# Altium PCB REALY_T0.10.PcbDoc
Units mil, origin at the board's own origin, x right, y up, seen from the top; angles counter-clockwise.
Board outline 2720.08 x 2838.58 mil, 4 copper layers (TopLayer, MidLayer1, MidLayer2, BottomLayer); 23 components, 16 nets, 57 pads, 16 vias.
Unrouted connection lines stored in the file: 1.
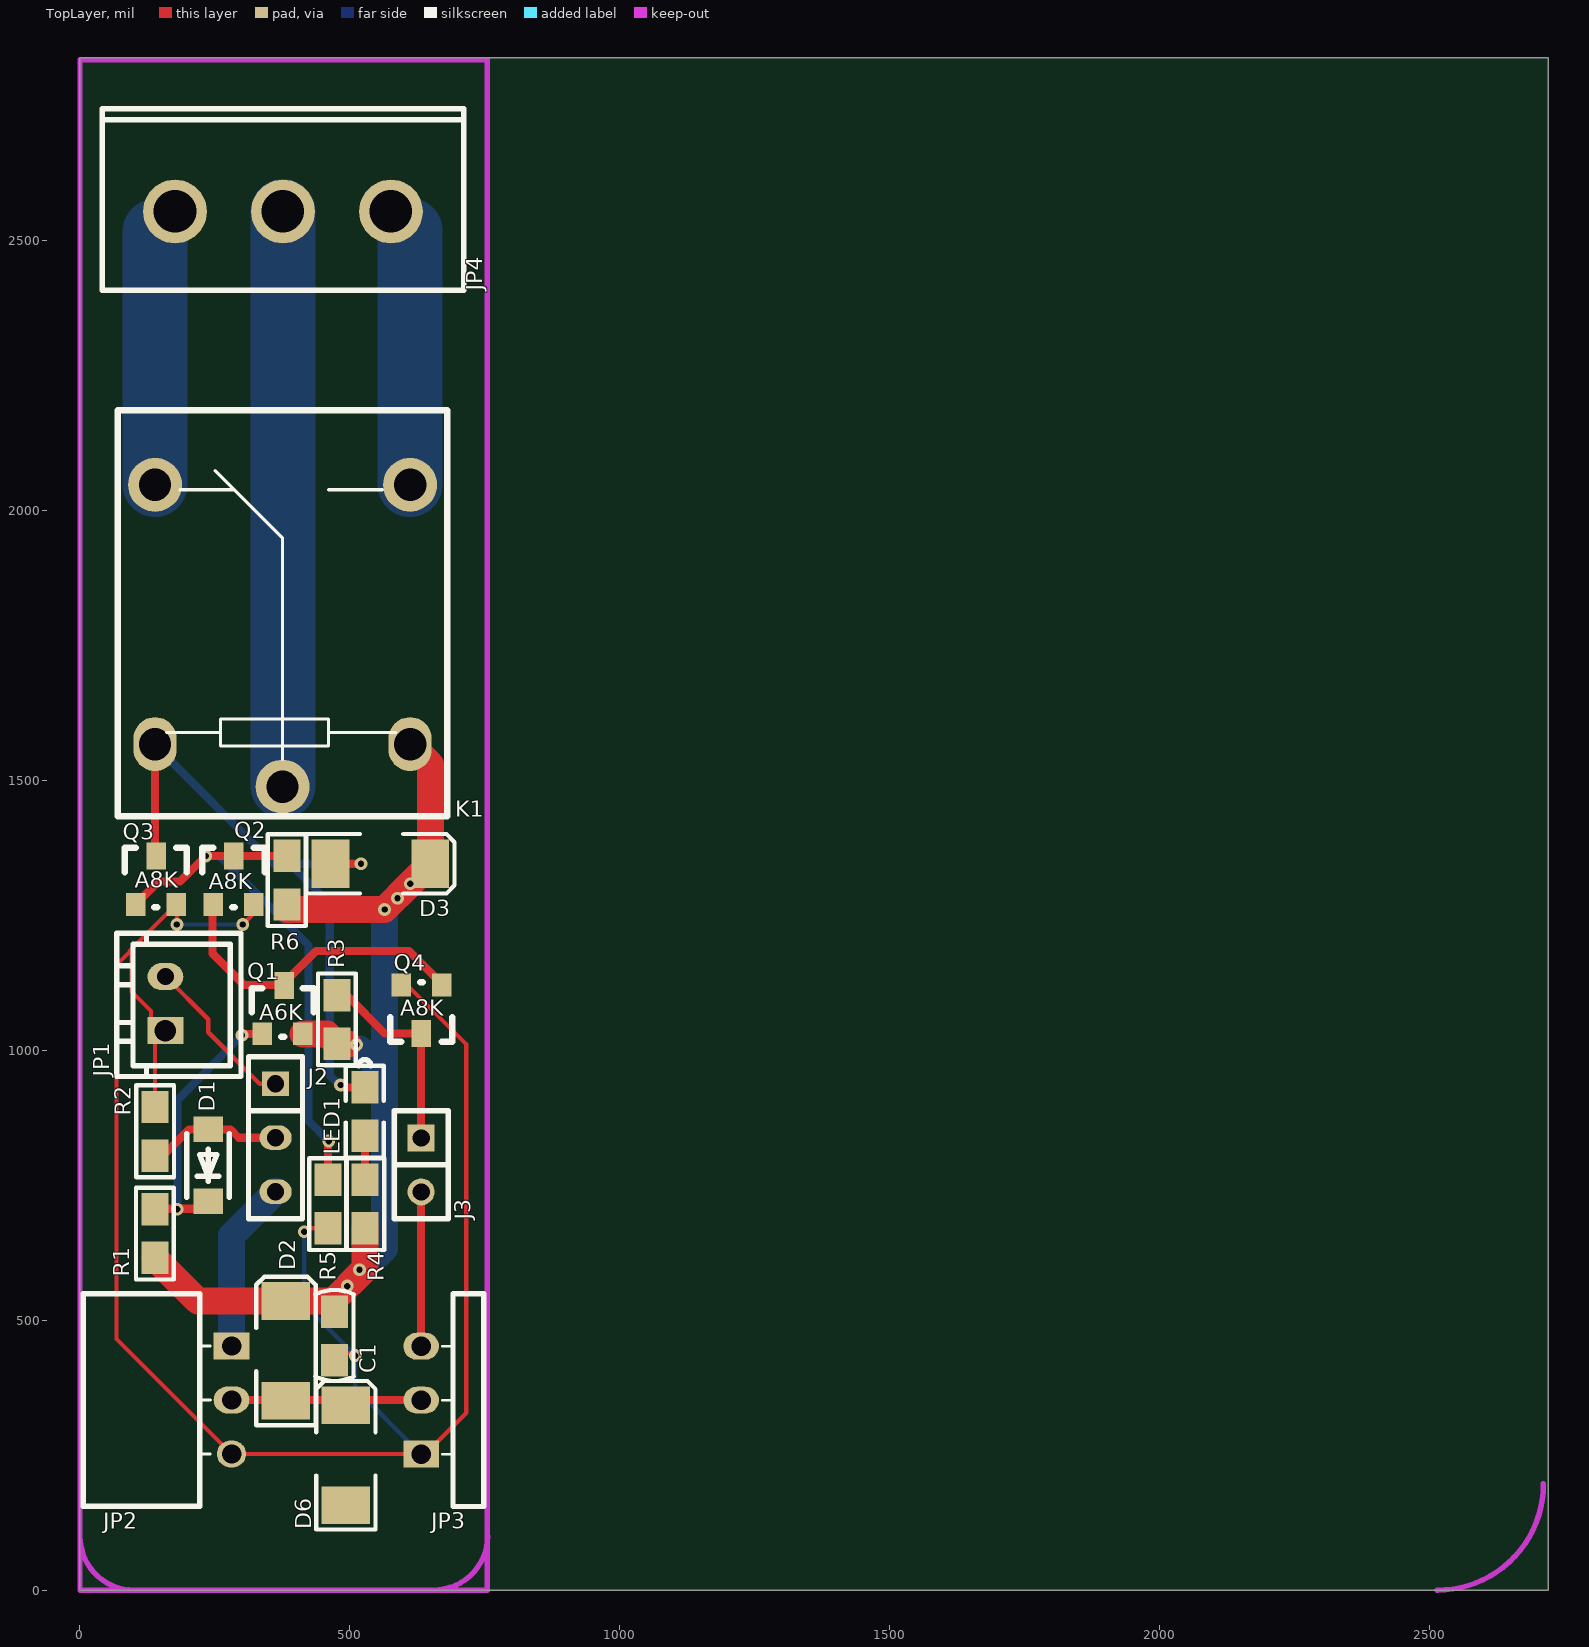
[diagram p0: TopLayer view]
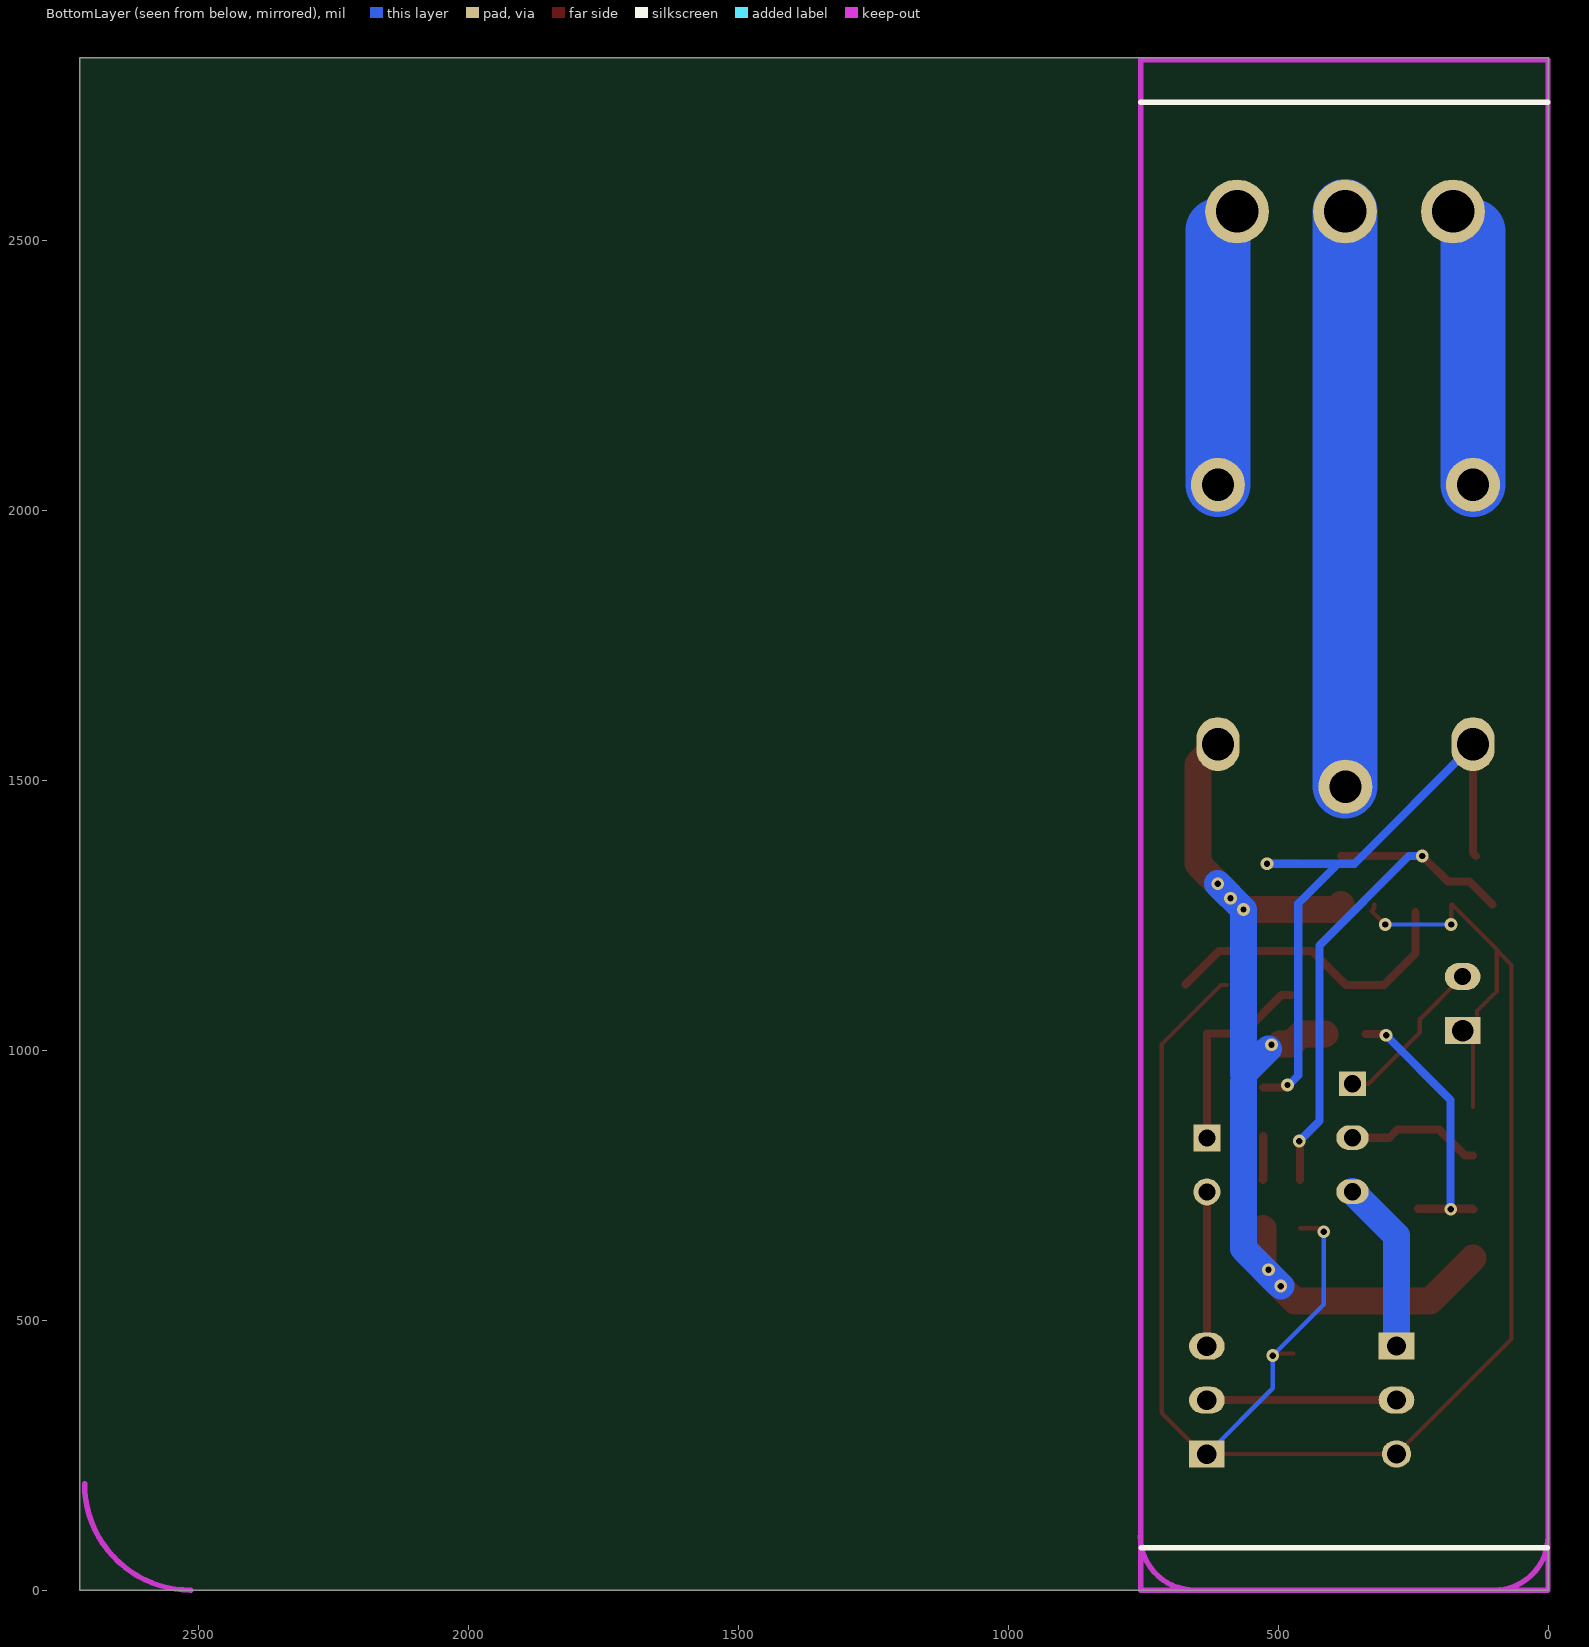
[diagram p1: BottomLayer view, seen from below]

## Layer stack, top to bottom
TopLayer: signal copper 1.4
Dielectric: core 12.6, FR-4, Dk 4.8
MidLayer1: signal copper 1.4
Dielectric: prepreg 12.6, FR-4, Dk 4.8
MidLayer2: signal copper 1.4
Dielectric: core 12.6, FR-4, Dk 4.8
BottomLayer: signal copper 1.4

## Board outline
-0.39,0 2719.68,0 2719.69,2838.58 -0.39,2838.58

## Design rules (kind name [scope] priority, off if disabled: settings)
Clearance Poly [(InPoly)] p1: gap=20
Clearance Clearance_1 [All] p2 off: gap=15
Clearance [All] p3: gap=7
ComponentClearance ComponentClearance_1 [All] p1 off: gap=10 collisioncheckmode=3 verticalgap=10 showdistances=FALSE
FabricationTestPointUsage TestPointUsage [All] p1: valid=0 allowmultiple=FALSE
FabricationTestpoint Testpoint [All] p1: side=3 testpointundercomponent=TRUE minsize=40 maxsize=100 preferedsize=60 minholesize=20 maxholesize=40 preferedholesize=32 testpointgrid=1 allowsidetop=TRUE allowsidebottom=TRUE usegrid=TRUE gridtolerance=0.01
HoleSize [All] p1: absolutevalues=TRUE maxlimit=200 minlimit=0 maxpercent=80.000 minpercent=20.000
ParallelSegment [All] p1: limit=10000 gap=10
PolygonConnect via [All vs IsVia] p1: connectstyle=Direct reliefconductorwidth=10 reliefentries=4 polygonreliefangle="90 Angle"
PolygonConnect [All] p2: connectstyle=Relief reliefconductorwidth=24 reliefentries=4 polygonreliefangle="90 Angle"
RoutingLayers [All] p1: top layer_v5=TRUE mid layer 1_v5=FALSE mid layer 2_v5=FALSE bottom layer_v5=TRUE
RoutingVias RoutingVias_3 [All] p1: holewidth=20 width=30 viastyle="Through Hole" minholewidth=20 minwidth=30 maxholewidth=20 maxwidth=30
RoutingVias [All] p2 off: holewidth=16 width=28 viastyle="Through Hole" minholewidth=16 minwidth=28 maxholewidth=50 maxwidth=100
SilkscreenOverComponentPads SilkToSolderMaskClearance [IsPad] p1: minsilkscreentomaskgap=10
SolderMaskExpansion [All] p1: expansion=4
Width [InNetClass('All From-Tos')] p1 off: maxlimit=100 minlimit=8 preferedwidth=60
Width Width_1 [All] p2: maxlimit=100 minlimit=3.94 preferedwidth=8
22 further rules are at their usual default settings.

## Components (designator, comment, footprint, x,y, rotation, side; value= is the part's Value field where it differs from the comment)
C1 "104" 0805C 471.65,516.14 r270 top
D1 "1N4148" SOD-123_L2.8-W1.8-LS3.7-RD 237.4,787.01 r90 top
D2 "1N4007" SMA 381.5,350.79 r90 top
D3 "1N4007" SMA 463.82,1345.67 r0 top
D6 "SMAJ12CA" SMA 492.52,157.52 r90 top
J2 "HEADER 3" SIP3 362.2,938.19 r270 top
J3 "CON2" SIP2 631.89,837.8 r270 top
JP1 "CON2" CON2A 158.27,1036.61 r90 top
JP2 "HEADER 3" XH2.54-W-3P#1 280.71,352.36 r270 top
JP3 "HEADER 3" XH2.54-W-3P#2 631.89,351.97 r90 top
JP4 "KF142V-3P" CONN-TH_3P-P5.08-WJ2EDGVC-3P 375.98,2553.94 r0 top
K1 "SRD-12VDC-SL-C" REALY-SRD 375.2,1488.58 r180 top
LED1 "LED-YG" LED0805 527.56,841.5 r90 top
Q1 "SS8550" SOT-23PNP 337.95,1030.47 r0 top
Q2 "LMUN2233LT1G" SOT-23NPN 246.85,1270.08 r0 top
Q3 "LMUN2233LT1G" SOT-23NPN 102.95,1270.08 r0 top
Q4 "LMUN2233LT1G" SOT-23NPN 669.89,1121.1 r180 top
R1 "103" 0805A 138.58,705.51 r270 top
R2 "103" 0805A 138.98,805.12 r90 top
R3 "302" 0805A 475.98,1102.2 r270 top
R4 "103" 0805A 528.35,760.24 r270 top
R5 "103" 0805A 459.45,760.24 r270 top
R6 "103" 0805A 383.07,1270.24 r90 top

## Footprints (in the part's own frame and the unit in brackets; to place one, negate y for a bottom-side part, rotate by r counter-clockwise, add the part's x,y. Pads: shape width x height; smd on the part's side, far side on the other; paste and mask are expansions set on the pad)
0805A [mil]
  rect 60x50 smd: 1(0,0) 2(90,0)
  silkscreen extent -40,-35 130,35
0805C [mil]
  rect 60x50 smd: 1(0,0) 2(90,0)
  silkscreen extent -40,-36 128,36
CON2A [mil]
  rect 50x66 hole 40: 1(0,0)
  oval 50x66 hole 32: 2(100,0)
  silkscreen extent -85,-140 180,90
CONN-TH_3P-P5.08-WJ2EDGVC-3P [mm]
  round 3 hole 2: 1(-5.08,0) 2(0,0) 3(5.08,0)
  silkscreen extent -8.5,-3.71 8.5,4.83
LED0805 [mil]
  rect 60x50 smd: A(0,0) K(90,0)
  silkscreen extent -40,-35 141,35
REALY-SRD [mm]
  round 2.54 hole 1.524: 1(0,0) 2(-6,-14.2) 3(6,-14.2)
  oval 2.032x2.54 hole 1.524: 4(6,-2) 5(-6,-2)
  silkscreen extent -7.75,-17.7 7.75,1.4
SIP2 [mil]
  rect 50x50 hole 32: 1(0,0)
  round 50 hole 32: 2(100,0)
  silkscreen extent -50,-50 150,50
SIP3 [mil]
  rect 46x50 hole 32: 1(0,0)
  oval 46x60 hole 32: 2(100,0) 3(200,0)
  silkscreen extent -50,-50 250,50
SMA [mil]
  rect 70x90 smd: 1(0,0) 2(185,0)
  silkscreen extent -45,-55 230,55
SOD-123_L2.8-W1.8-LS3.7-RD [mm]
  rect 1.2x1.4 smd: 1(1.7,0) 2(-1.7,0)
  silkscreen extent -1.5,-1 1.5,1
SOT-23NPN [mil]
  rect 36x42 smd: 1(0,0) 3(75,0)
  rect 36x50 smd: 2(38,90)
  silkscreen extent -20,-5 95,105
SOT-23PNP [mil]
  rect 36x42 smd: 1(0,0) 2(75,0)
  rect 36x50 smd: 3(40,90)
  silkscreen extent -20,-5 95,85
XH2.54-W-3P#1 [mil]
  rect 50x66 hole 36: 1(-100,0)
  oval 50x66 hole 36: 2(0,0)
  oval 50x54 hole 36: 3(100,0)
  silkscreen extent -197,-275 197,-39
XH2.54-W-3P#2 [mil]
  rect 50x66 hole 36: 1(-100,0)
  oval 50x66 hole 36: 2(0,0) 3(100,0)
  silkscreen extent -197,-116 197,-39

## Part data
C1: library part CAP, "Capacitor"
D1 D2 D3 D6: library part DIODE, "Diode"
J3 JP1: "Connector"
JP4: library part "HEADER 3"
K1: library part RELAY-SPDT
LED1: library part LED
Q1: library part PNP, "PNP Transistor"
Q2 Q3 Q4: library part NPN, "NPN Transistor"
R1 R2 R3 R4 R5 R6: library part RES

## Via types
v1: diameter 23.62, hole 11.81, TopLayer to BottomLayer, 16 vias

## Nets (pads, with @x,y where several pads share a name; then routed paths per layer and width w, separated by ;. In a path a pad name is that pad's centre, name@x,y a point inside that pad or via, vN(x,y) a via of type N, cw(c..) or ccw(c..) an arc to the next point about the centre after c; other vN are vias at no path point)
12V: C1.1 D2.2 D3.2 K1.5 Q1.2 R1.2 R3.2 R4.2 R6.1 | length 2005.7
  TopLayer w50: R1.2 218.31,535.79 D2.2 468.46,535.79 528.35,595.67 R4.2 ; R6.1 383.07,1261.02 v1(564.17,1261.02) v1(611.81,1308.66) D3.2 648.82,1529.92 K1.5 ; Q1.2 457.72,1030.47 R3.2 R3.2@496.65,1012.2
  BottomLayer w50: v1(494.88,563.39) 564.17,632.68 564.17,942.52 ; v1@518.11,1002.36 564.17,956.3 v1(564.17,1261.02) v1(611.81,1308.66)
  other v1: 517.72,593.7 512.2,1010.24 588.19,1281.89
+12V_IN: D2.1 D6.2 JP2.2 JP3.2 | length 351.3
  TopLayer w15: JP2.2 631.5,352.36 JP3.2
COM5: JP4.2 K1.1 | length 1065.7
  BottomLayer w8: K1.1 K1.1@375.98,1489.37
  BottomLayer w120: K1.1@375.98,1489.37 JP4.2
GND: C1.2 D6.1 JP1.1 JP2.3 JP3.1 Q2.3 Q3.3 Q4.3 R2.2 R5.2 | length 3573.1
  TopLayer w8: 95.28,1183.46 95.28,1109.06 131.5,1072.83 JP1.1@131.5,1039.37 ; R2.2 138.98,1017.32 JP1.1 ; v1(179.53,1233.07) 179.53,1268.5 Q3.3 91.73,1183.86 91.73,1182.28 67.72,1158.27 67.72,465.35 JP2.3 631.5,252.36 JP3.1 638.98,251.97 715.75,328.74 715.75,1011.02 605.67,1121.1 Q4.3 ; v1(301.57,1233.07) 326.77,1258.27 321.85,1263.19 Q2.3 ; v1(415.35,663.78) 421.81,670.24 R5.2 ; C1.2@471.65,438.35 506.14,438.35 v1(509.84,434.65)
  BottomLayer w8: v1(179.53,1233.07) v1(301.57,1233.07) ; v1(415.35,663.78) 415.35,529.13 v1(509.84,434.65) 509.84,374.02 JP3.1
NC5: JP4.1 K1.3 | length 521.6
  BottomLayer w8: JP4.1@138.98,2516.93 JP4.1
  BottomLayer w120: K1.3 JP4.1@138.98,2516.93
NetD1_1: D1.1 J2.2 R2.1 | length 249.3
  TopLayer w15: R2.1 153.98,805.12 202.01,853.15 279.09,853.15 294.06,838.19 J2.2
NetD1_2: D1.2 Q1.1 R1.1 | length 513.1
  TopLayer w15: R1.1 139.76,706.69 237.4,706.69 D1.2@240.55,706.69 ; v1(300,1027.95) 302.52,1030.47 Q1.1
  BottomLayer w15: v1(180.32,705.91) 180.32,908.27 v1(300,1027.95)
NetD3_1: D3.1 K1.4 LED1.K Q3.2 | length 1237
  TopLayer w15: Q3.2@133.86,1360.24 138.98,1365.35 K1.4 ; D3.1 v1(520.47,1345.67) ; v1(482.68,935.83) 487.01,931.5 LED1.K
  BottomLayer w15: K1.4 138.98,1565.35 358.66,1345.67 388.98,1345.67 ; v1(482.68,935.83) 480.32,935.83 462.6,953.54 462.6,1272.05 388.98,1345.67 ; v1(520.47,1345.67) 388.98,1345.67
NetJ2_1: J2.1 JP1.2 | length 300.2
  TopLayer w8: JP1.2 237.4,1057.48 237.4,1033.46 332.68,938.19 J2.1
NetJ2_3: J2.3 JP2.1 | length 319.6
  BottomLayer w50: JP2.1 280.71,656.69 J2.3
NetJ3_1: J3.1 Q4.2 R3.1 | length 378.7
  TopLayer w15: R3.1 493.46,1102.2 564.57,1031.1 Q4.2 J3.1
NetJ3_2: J3.2 JP3.3 | length 285.8
  TopLayer w15: JP3.3 J3.2
NetLED1_A: LED1.A R4.1 | length 81.6
  TopLayer w15: LED1.A 527.56,761.02 R4.1
NetQ1_2: Q1.3 Q2.1 Q4.1 | length 578.5
  TopLayer w15: Q2.1@245.67,1255.91 245.67,1179.53 304.09,1121.1 374.25,1121.1 437.4,1184.25 609.45,1184.25 Q4.1@671.65,1122.05
NetQ2_2: Q2.2 Q3.1 R5.1 R6.2 | length 1026.8
  TopLayer w15: Q3.1 145.47,1312.6 185.43,1312.6 v1(232.91,1360.08) Q2.2 382.91,1360.08 R6.2 ; R5.1 459.45,830.71 v1(460.63,831.89)
  BottomLayer w15: v1(232.91,1360.08) 258.03,1360.08 423.62,1194.49 423.62,868.9 v1(460.63,831.89)
NO5: JP4.3 K1.2 | length 521
  BottomLayer w8: JP4.3 JP4.3@611.42,2518.5
  BottomLayer w120: K1.2 JP4.3@611.42,2518.5

## Polygon pours and split planes (outlines as drawn)
GND on TopLayer "BotLayer-GND" (solid, remove dead copper, pour order 12): -2419.45,2647.12 -2419.45,2314.44 -2435.2,2298.69 -3204.89,2298.69 -3204.89,-187.92 -633.87,-187.92 -483.23,-37.28 -483.23,2647.12
GND on TopLayer "TopLayer-GND" (hatched 45Degree grid 10 track 11, remove dead copper, pour order 0): -41635.51,-50705.14
no net on MidLayer1 "MidLayer1-No Net 3" (hatched 90Degree grid 10 track 10, remove dead copper, pour order 2): 1864.49,5776.93 1864.49,5485.01 2407.95,5485.01 2407.95,5787.11 1859.76,5787.11
no net on MidLayer1 "MidLayer1-No Net 2" (hatched 90Degree grid 10 track 10, remove dead copper, pour order 4): 1834.49,5787.11 1834.49,5544.86 2407.95,5544.86 2407.95,5797.29 1839.39,5797.29
no net on MidLayer1 "MidLayer1-No Net 1" (hatched 90Degree grid 8 track 10, remove dead copper, pour order 6): -41635.51,-50705.14
no net on MidLayer1 "MidLayer1-No Net" (hatched 90Degree grid 8 track 10, remove dead copper, pour order 8): -41635.51,-50705.14
no net on MidLayer2 "MidLayer2-No Net" (hatched 90Degree grid 8 track 10, pour order 10): -41635.51,-50705.14
GND on BottomLayer "BotLayer-GND" (solid, remove dead copper, pour order 14): -3432.04,2458.51 -3430.86,2457.33 -3430.86,-47.39 -856.69,-47.39 -712.74,96.55 -712.74,2787.65 -2647,2787.65 -2648.97,2785.68 -2648.97,2448.28 -2658.41,2438.83 -3430.81,2438.83

## Keep-outs
KeepOutLayer:
  lines w10: 0,100 ccw(c100,100) 100,0 ; 655.12,0.39 ccw(c655.12,100.39) 755.12,100.39 ; 2513.94,0 ccw(c2513.94,196.85) 2710.79,196.85 ; 0,0 754.72,0 754.72,2834.65 0,2834.65 0,0

## Silkscreen, mask and mechanical layers (free items; w line width, h text height)
TopOverlay:
  text "A8K" at 101.18,1300.79 h30
  text "A8K" at 238.58,1298.43 h30
  text "A8K" at 593.31,1063.78 h30
  text "A6K" at 332.28,1055.51 h30
BottomOverlay:
  lines w10: 0,2755.91 754.72,2755.91 ; 1.57,78.74 753.54,78.74